# Altium PCB Anya_2620_V1_I1.PcbDoc (part 2 of 2)
Units mm, origin at the board's own origin, x right, y up, seen from the top; angles counter-clockwise.
Board outline 70 x 70 mm, 2 copper layers (Top Layer, Bottom Layer), stack 1.671 mm thick; 61 components, 36 nets, 234 pads, 129 vias.
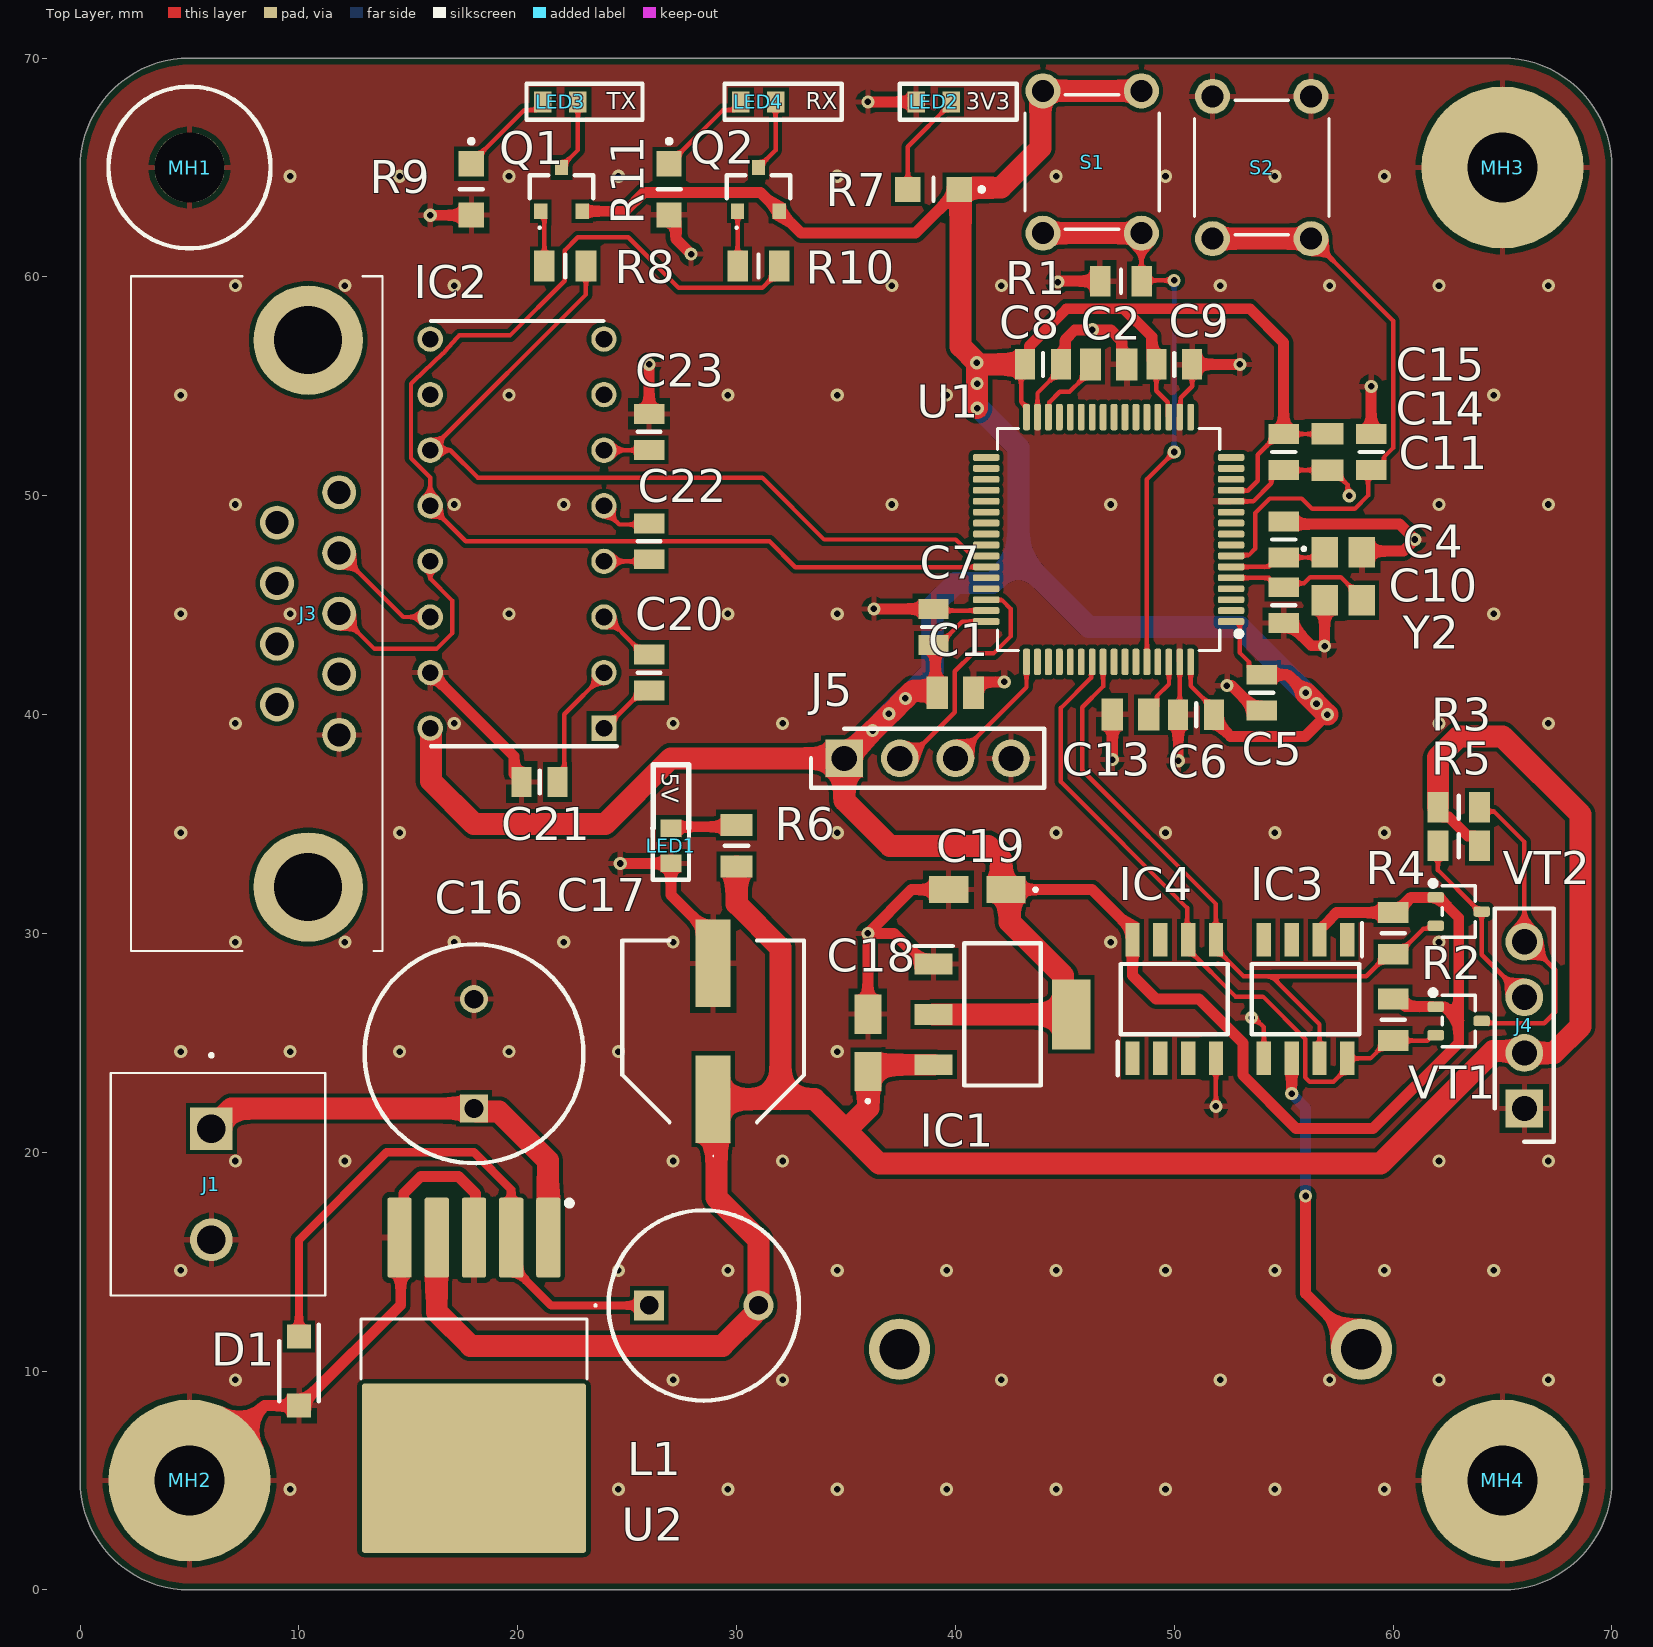
[diagram p0: Top Layer view]

## Silkscreen, mask and mechanical layers (free items; w line width, h text height) (continued)
Bottom Overlay: (continued)
  text "SWCLK" at 40.6,35.973 h0.76 r90
  text "GND" at 43.279,35.973 h0.76 r90
  text "LCD_I2C_SCL" at 64.173,29.054 h0.76
  text "LCD_I2C_SDA" at 64.173,26.513 h0.76
  text "+5V" at 64.173,23.9 h0.76
  text "GND" at 64.173,21.386 h0.76
  text "+12V" at 14.397,20.087 h1.52
  text "GND" at 13.518,15.271 h1.52
Mechanical 1:
  the board outline again, w0.254